# Altium PCB atxmega.PcbDoc
Units mm, origin at the board's own origin, x right, y up, seen from the top; angles counter-clockwise.
Board outline 50.2 x 40.2 mm, 2 copper layers (Top Layer, Bottom Layer); 38 components, 48 nets, 224 pads, 73 vias.
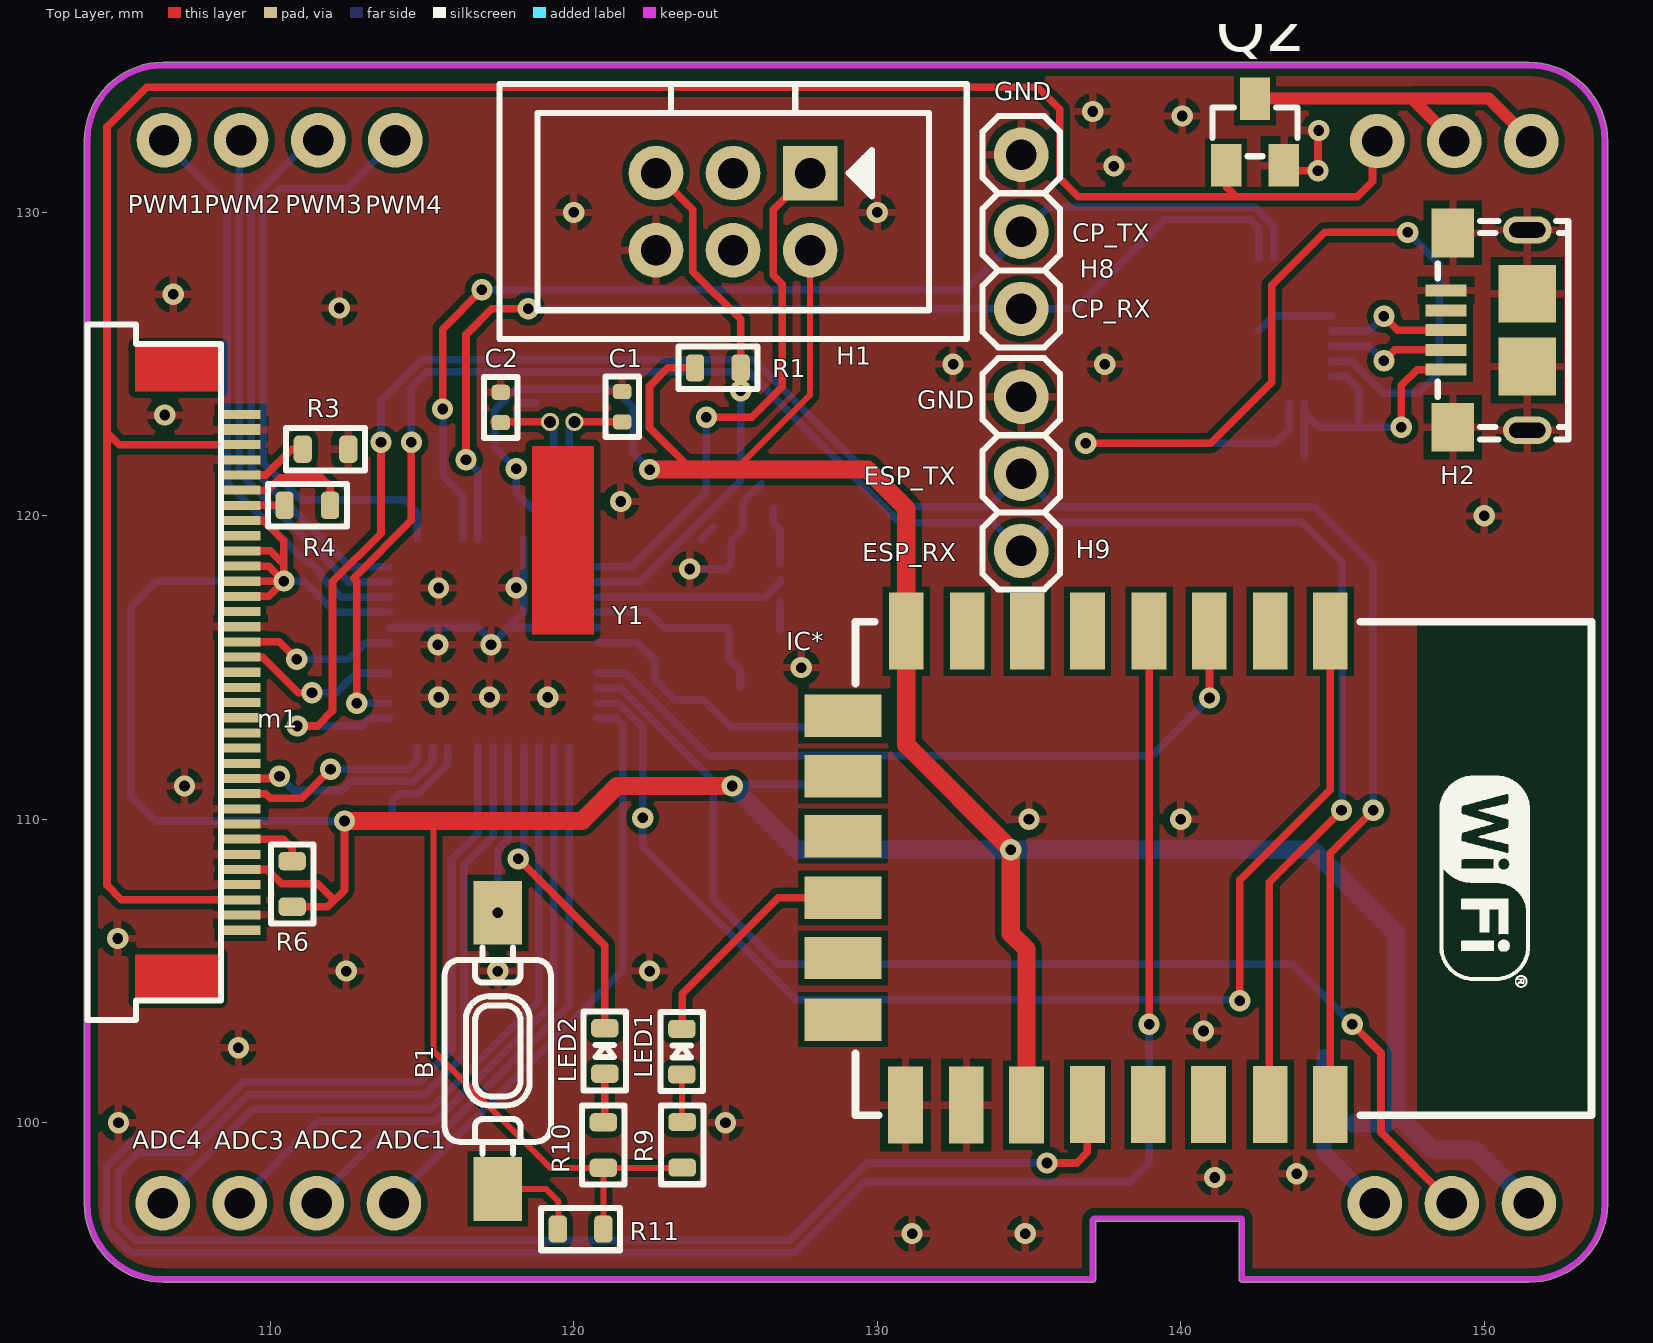
[diagram p0: Top Layer view]
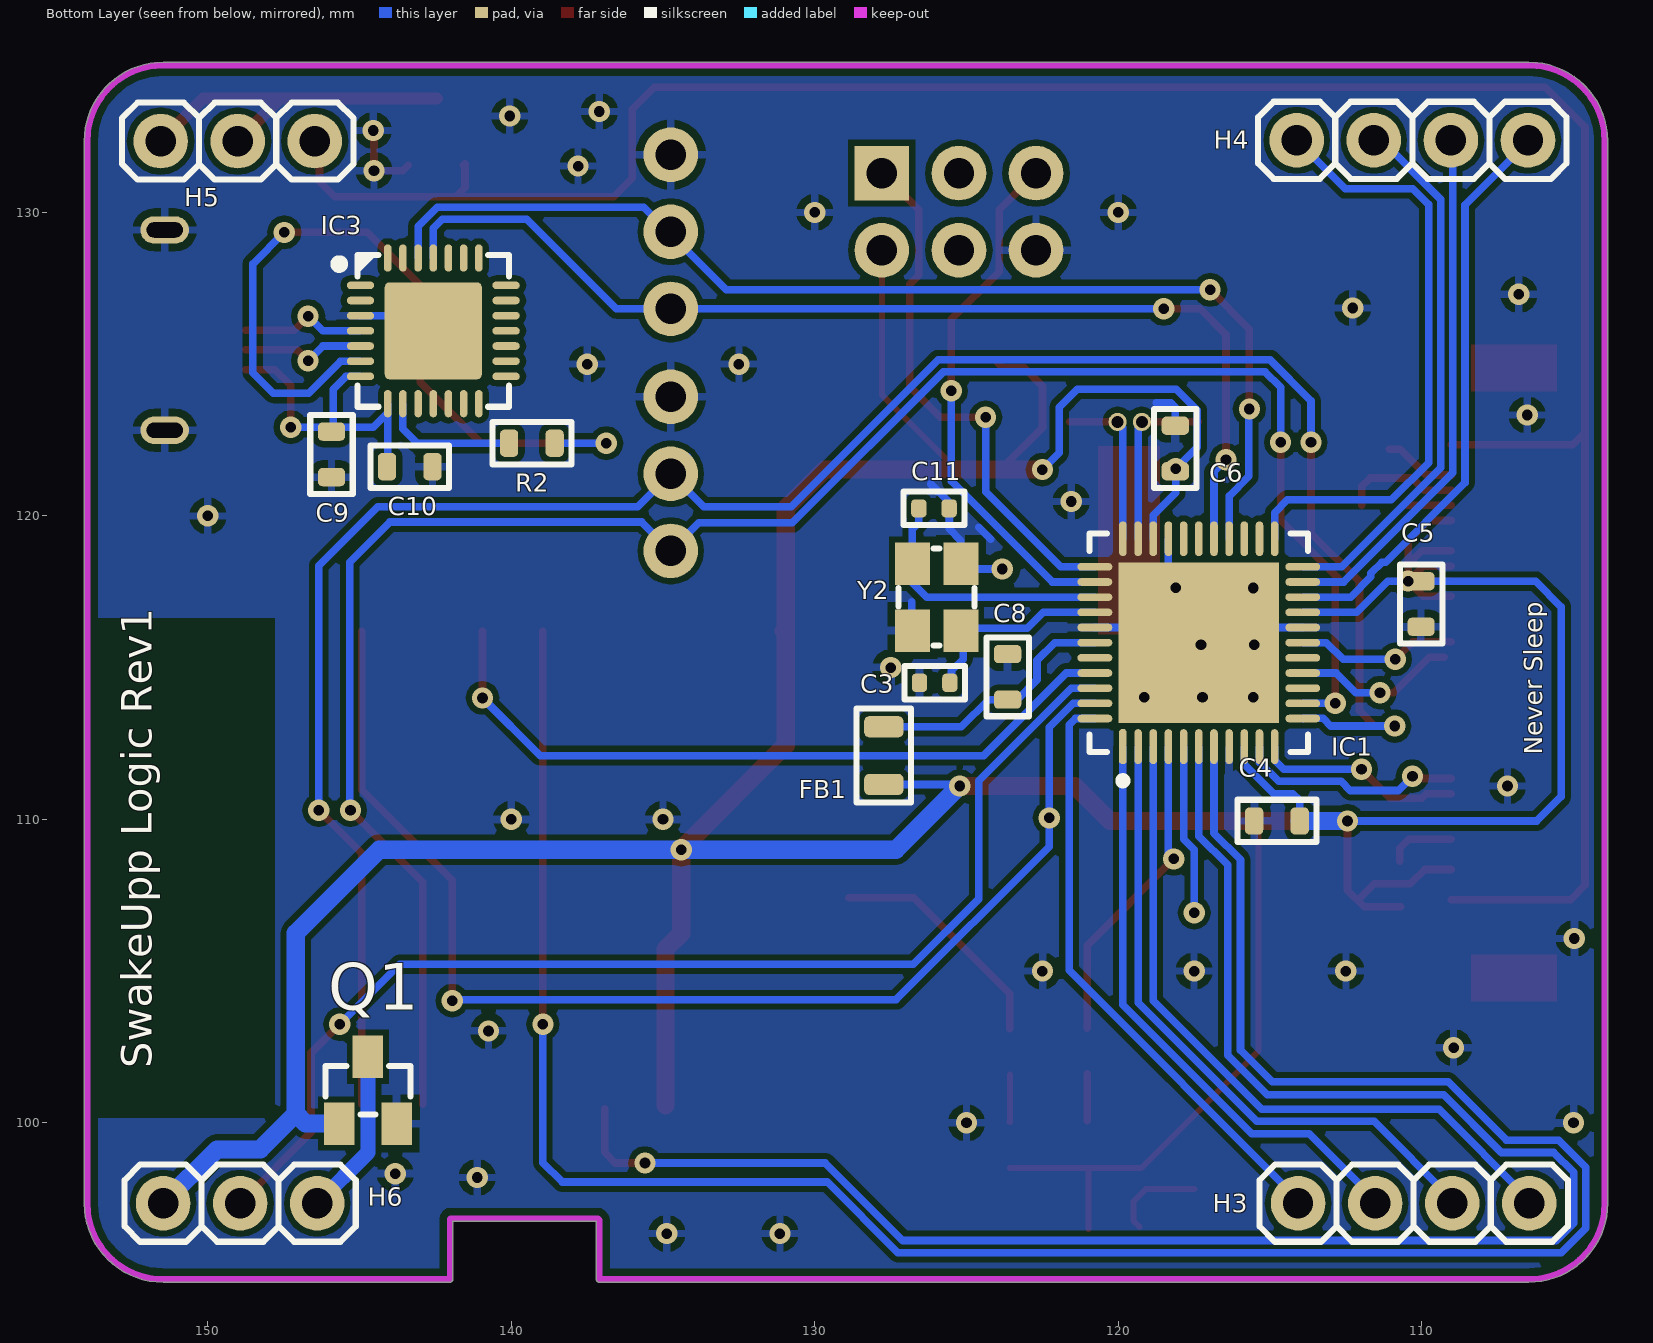
[diagram p1: Bottom Layer view, seen from below]

## Layer stack, top to bottom
Top Solder: solder mask 0.0102, Solder Resist, Dk 3.5
Top Layer: signal copper 0.0356
Dielectric 1: dielectric 0.32, FR-4, Dk 4.8
Bottom Layer: signal copper 0.0356
Bottom Solder: solder mask 0.0102, Solder Resist, Dk 3.5

## Board outline
106.472,94.746 137.1,94.746 ccw(c137.1,94.847) 137.2,94.847 137.2,96.75 141.925,96.75 141.925,94.85 ccw(c142.025,94.85) 141.956,94.777 ccw(c142.028,94.847) 142.028,94.746 151.472,94.746 ccw(c151.472,94.847) 151.476,94.746 ccw(c151.471,97.347) 154.072,97.342 ccw(c153.972,97.347) 154.072,97.347 154.072,132.347 ccw(c151.472,132.347) 151.472,134.947 106.472,134.947 ccw(c106.472,132.347) 103.871,132.353 ccw(c103.972,132.347) 103.871,132.347 103.871,97.347 ccw(c106.472,97.347)

## Design rules (kind name [scope] priority, off if disabled: settings)
Clearance Clearance_1 [OnLayer('Keep-Out Layer') vs InPolygon] p1: gap=0.25
Clearance Clearance_2 [OnLayer('Keep-Out Layer')] p2: gap=0
Clearance Clearance_6 [HasFootprint('FEDUCIAL')] p3: gap=1.1
Clearance [InPolygon] p4: gap=0.2
Clearance Clearance_3 [IsTrack AND AsMM(Width) > 0.2] p5: gap=0.2
Clearance Clearance_4 [All] p6: gap=0.15
ComponentClearance [InComponentClass('Battery_Connection')] p1: gap=0 collisioncheckmode=3 verticalgap=0.1 showdistances=FALSE
ComponentClearance ComponentClearance_1 [All] p2: gap=0.1 collisioncheckmode=3 verticalgap=0.1 showdistances=FALSE
DiffPairsRouting [All] p1: maxlimit=1 minlimit=0.15 mostfreqgap=0.2 toplayer_minwidth=0.15 toplayer_maxwidth=10 toplayer_prefwidth=0.2 bottomlayer_minwidth=0.15 bottomlayer_maxwidth=10 bottomlayer_prefwidth=0.2 maxuncoupledlength=12.7
Height [All] p1: minheight=0 maxheight=1000 prefheight=12.7
HoleSize [All] p1: absolutevalues=TRUE maxlimit=20 minlimit=0.025 maxpercent=80.000 minpercent=20.000
MinimumSolderMaskSliver [All] p1: minsoldermaskwidth=0
PlaneClearance [All] p1: clearance=0.2
PolygonConnect PolygonConnect_3 [All vs IsNamedPolygon('GND_PLANE')] p1: connectstyle=Relief reliefconductorwidth=0.254 reliefentries=4 polygonreliefangle="90 Angle" airgapwidth=0.15
PolygonConnect PolygonConnect_2 [InNamedPolygon('GND_PLANE')] p2: connectstyle=Relief reliefconductorwidth=0.254 reliefentries=4 polygonreliefangle="90 Angle" airgapwidth=0.254
PolygonConnect PolygonConnect_1 [All] p3: connectstyle=Relief reliefconductorwidth=0.254 reliefentries=4 polygonreliefangle="90 Angle" airgapwidth=0.254
RoutingVias [All] p1: holewidth=0.3 width=0.6 viastyle="Through Hole" minholewidth=0.3 minwidth=0.6 maxholewidth=100 maxwidth=100
SilkToSilkClearance [All] p1: silktosilkclearance=0
SilkToSolderMaskClearance [IsPad] p1: minsilkscreentomaskgap=0 clearancetoexposedcopper=TRUE
SolderMaskExpansion [All] p1: expansion=0.102
Width [All] p1: maxlimit=100 minlimit=0.15 preferedwidth=0.2
22 further rules are at their usual default settings.

## Classes and differential pairs
differential pair class USB: D
differential pair D: +D_P -D_N

## Components (designator, comment, footprint, x,y, rotation, side; value= is the part's Value field where it differs from the comment)
B1 "Tactile_Button_2term" TACTILE_MINATUE_SMD_3.5x6mm 117.497,102.372 r270 top
C1 "12pF" C0402 121.597,123.597 r90 top
C2 "12pF" C0402 117.597,123.572 r90 top
C3 "12pF" C0402 126.05,114.5 r0 bottom
C4 "100nF" C0603 114.772,109.947 r0 bottom
C5 "100nF" C0603 110.022,117.097 r270 bottom
C6 "100nF" C0603 118.122,122.222 r90 bottom
C8 "100nF" C0603 123.647,114.697 r90 bottom
C9 "100nF" C0603 145.925,122.025 r90 bottom
C10 "1uF" C0603 143.347,121.622 r0 bottom
C11 "12pF" C0402 126.072,120.247 r180 bottom
FB1 "220R @ 100MHz" L0805 127.725,112.1 r270 bottom
H1 "Header_PDI" 6-HEADER_BOXED 125.25,130.025 r180 top
H2 "USB_5pin" USB_Micro_B_RECEPTABLE_FCI 152.872,126.122 r90 top
H3 "Header_4" Header_MALE_4 114.075,97.35 r180 bottom
H4 "Header_4" Header_MALE_4 106.5,132.375 r0 bottom
H5 "Header_3" Header_MALE_3 146.475,132.35 r0 bottom
H6 "Header_3" Header_MALE_3 151.475,97.35 r180 bottom
H8 "Header_3" Header_MALE_3 134.747,126.822 r90 top
H9 "Header_3" Header_MALE_3 134.747,118.847 r90 top
IC1 "ATXMEGA128A4U-MH" 44-VFQFN-E 117.347,115.822 r90 bottom
IC3 "CP_2102" 28-QFN_Exposed_pad 142.572,126.097 r180 bottom
IC* "ESP12-E" ESP12-E 134.175,107.825 r270 top
LED1 "LED" 0603_LED 123.563,102.345 r90 top
LED2 "LED" 0603_LED 121.025,102.368 r90 top
m1 "OEL Display Module" FFC-35-pin-0.5 107.322,114.847 r0 top
Q1 "N_MOSFET_ENH" SOT-23 144.725,101.075 r180 bottom
Q2 "N_MOSFET_ENH" SOT-23 142.45,132.65 r0 top
R1 "10k" R0603 124.75,124.875 r0 top
R2 "10k" R0603 139.322,122.397 r0 bottom
R3 "70K" R0603 111.822,122.197 r180 top
R4 "10K" R0603 111.222,120.347 r0 top
R6 "10K" R0603 110.722,107.872 r90 top
R9 "1k" R0603 123.575,99.275 r90 top
R10 "1k" R0603 120.975,99.268 r90 top
R11 "10k" R0603 120.225,96.5 r180 top
Y1 "32.768" crystal_6.2x2.1x2.1 120.022,123.097 r90 top
Y2 "Crystal_Ground" Crystal_3.2x2.5 125.985,117.322 r270 bottom

## Footprints (in the part's own frame and the unit in brackets; to place one, negate y for a bottom-side part, rotate by r counter-clockwise, add the part's x,y. Pads: shape width x height; smd on the part's side, far side on the other; paste and mask are expansions set on the pad)
6-HEADER_BOXED [mm]
  rect 1.8x1.8 hole 1: 1(-2.54,-1.27)
  round 1.8 hole 1: 2(-2.54,1.27) 3(0,-1.27) 4(0,1.27) 5(2.54,-1.27) 6(2.54,1.27)
  silkscreen extent -7.7,-4.2 7.7,4.2, body extent -7.7,-4.2 7.7,4.2, height 9.3
28-QFN_Exposed_pad [mm] "QFN, 28-Leads, Body 5,00x5,00mm, Pitch 0,50mm"
  oval 0.9x0.25 smd: 1(-2.4,1.5) 2(-2.4,1) 3(-2.4,0.5) 4(-2.4,0) 5(-2.4,-0.5) 6(-2.4,-1) 7(-2.4,-1.5) 15(2.4,-1.5) 16(2.4,-1) 17(2.4,-0.5) 18(2.4,0) 19(2.4,0.5) 20(2.4,1) 21(2.4,1.5)
  oval 0.25x0.9 smd: 8(-1.5,-2.4) 9(-1,-2.4) 10(-0.5,-2.4) 11(0,-2.4) 12(0.5,-2.4) 13(1,-2.4) 14(1.5,-2.4) 22(1.5,2.4) 23(1,2.4) 24(0.5,2.4) 25(0,2.4) 26(-0.5,2.4) 27(-1,2.4) 28(-1.5,2.4)
  rrect10% 3.2x3.2 smd paste-20: PAD(0,0)
  silkscreen extent -3.24,-2.5 2.5,2.5, body extent -2.52,-2.52 2.52,2.52, height 0.91
44-VFQFN-E [mm] "44-VFQFN Exposed Pad  7x7"
  oct 1.15x0.25 smd: 1(-3.425,2.5)
  oval 1.15x0.25 smd: 2(-3.425,2) 3(-3.425,1.5) 4(-3.425,1) 5(-3.425,0.5) 6(-3.425,0) 7(-3.425,-0.5) 8(-3.425,-1) 9(-3.425,-1.5) 10(-3.425,-2) 11(-3.425,-2.5) 23(3.425,-2.5) 24(3.425,-2) 25(3.425,-1.5) 26(3.425,-1) 27(3.425,-0.5) 28(3.425,0) 29(3.425,0.5) 30(3.425,1) 31(3.425,1.5) 32(3.425,2) 33(3.425,2.5)
  oval 0.25x1.15 smd: 12(-2.5,-3.425) 13(-2,-3.425) 14(-1.5,-3.425) 15(-1,-3.425) 16(-0.5,-3.425) 17(0,-3.425) 18(0.5,-3.425) 19(1,-3.425) 20(1.5,-3.425) 21(2,-3.425) 22(2.5,-3.425) 34(2.5,3.425) 35(2,3.425) 36(1.5,3.425) 37(1,3.425) 38(0.5,3.425) 39(0,3.425) 40(-0.5,3.425) 41(-1,3.425) 42(-1.5,3.425) 43(-2,3.425) 44(-2.5,3.425)
  rect 5.3x5.3 smd: 45(0,0)
  silkscreen extent -4.67,-3.6 3.6,3.6, body extent -3.57,-3.57 3.57,3.57, height 1
0603_LED [mm]
  rrect50% 0.6x0.9 smd: A(-0.75,0) C(0.75,0)
  silkscreen extent -1.3,-0.7 1.3,0.7, body extent -0.81,-0.4 0.81,0.4, height 0.6
C0402 [mm]
  rrect50% 0.5x0.6 smd: 1(-0.5,0) 2(0.5,0)
  silkscreen extent -1,-0.55 1,0.55, body extent -0.51,-0.26 0.51,0.26, height 0.51
C0603 [mm]
  rrect50% 0.6x0.9 smd: 1(-0.75,0) 2(0.75,0)
  silkscreen extent -1.3,-0.7 1.3,0.7, body extent -0.86,-0.41 0.86,0.41, height 0.81
Crystal_3.2x2.5 [mm]
  rect 1.4x1.15 smd: 1(-1.1,-0.8) 2(-1.1,0.8) 2(1.1,-0.8) 3(1.1,0.8)
  silkscreen extent -1.6,-1.25 1.6,1.25, body extent -1.6,-1.25 1.6,1.25, height 0.6
crystal_6.2x2.1x2.1 [mm] "lying cylinder"
  round 0.6 hole 0.4: 0(0,0) 1(0,0.8)
  Top Layer region: -7,-0.65 -0.8,-0.65 -0.8,1.4 -7,1.4
  body extent -7.03,-0.7 -0.83,1.4, height 2.09
ESP12-E [mil] "WIFI module"
  rect 100x45 smd: 1(-329.79,423.34) 2(-329.79,345.34) 3(-329.79,266.34) 4(-329.79,188.34) 5(-329.79,108.34) 6(-329.79,30.34) 7(-329.79,-47.66) 8(-329.79,-126.66) 15(285.21,-127.66) 16(285.21,-48.66) 17(285.21,29.34) 18(284.21,108.34) 19(284.21,187.34) 20(284.21,265.34) 21(284.21,345.34) 22(284.21,423.34)
  rect 55x100 smd: 9(-219.79,-208.66) 10(-141.79,-208.66) 11(-63.79,-208.66) 12(16.21,-208.66) 13(94.21,-208.66) 14(174.21,-208.66)
  silkscreen extent -342,-193 298,762, body extent -339,-185 291,760
FFC-35-pin-0.5 [mm] "Flat Flexible Connector 35 positions pitch 0.5mm"
  rect 1.3x0.3 smd: 1(1.7,8.5) 3(1.7,7.5) 4(1.7,7) 5(1.7,6.5) 6(1.7,6) 7(1.7,5.5) 8(1.7,5) 9(1.7,4.5) 10(1.7,4) 11(1.7,3.5) 12(1.7,3) 13(1.7,2.5) 14(1.7,2) 15(1.7,1.5) 16(1.7,1) 17(1.7,0.5) 18(1.7,0) 19(1.7,-0.5) 20(1.7,-1) 21(1.7,-1.5) 22(1.7,-2) 23(1.7,-2.5) 24(1.7,-3) 25(1.7,-3.5) 26(1.7,-4) 27(1.7,-4.5) 28(1.7,-5) 29(1.7,-5.5) 30(1.7,-6) 31(1.7,-6.5) 32(1.7,-7) 33(1.7,-7.5) 34(1.7,-8) 35(1.7,-8.5)
  rect 1.3x0.35 smd: 2(1.7,8)
  Top Layer region: -1.775,9.25 1.05,9.25 1.05,10.8 -1.775,10.8
  Top Layer region: -1.775,-10.85 1.05,-10.85 1.05,-9.3 -1.775,-9.3
  silkscreen extent -3.35,-11.47 1.05,11.47, body extent -3.35,-11.48 1.05,11.42, height 2
Header_MALE_3 [mm]
  round 1.8 hole 1: 1(0,0) 2(2.54,0) 3(5.08,0)
  silkscreen extent -1.27,-1.27 6.35,1.27, body extent -1.27,-1.27 6.35,1.27, height 8.34
Header_MALE_4 [mm]
  round 1.8 hole 1: 1(0,0) 2(2.54,0) 3(5.08,0) 4(7.62,0)
  silkscreen extent -1.27,-1.27 8.89,1.27, body extent -1.27,-1.27 8.89,1.27, height 8.34
L0805 [mm]
  rrect50% 0.7x1.3 smd: 1(-0.95,0) 2(0.95,0)
  silkscreen extent -1.55,-0.9 1.55,0.9, body extent -1.01,-0.61 1.01,0.61, height 0.81
R0603 [mm]
  rrect50% 0.6x0.9 smd: 1(-0.75,0) 2(0.75,0)
  silkscreen extent -1.3,-0.7 1.3,0.7, body extent -0.86,-0.41 0.86,0.41, height 0.51
SOT-23 [mm]
  rect 1x1.4 smd: 1(-0.95,-1.1) 2(0.95,-1.1) 3(0,1.1)
  silkscreen extent -1.4,-0.8 1.4,0.8, body extent -1.4,-1.5 1.4,1.5, height 1
TACTILE_MINATUE_SMD_3.5x6mm [mm] "TE CONNECTIVITY FSM"
  rect 2.1x1.6 smd: 1(-4.55,0) 2(4.55,0)
  silkscreen extent -3.4,-1.75 3.4,1.75, body extent -5,-1.75 5,1.75, height 4.3
USB_Micro_B_RECEPTABLE_FCI [mm] "Micro USB header, surface mount with slots right angle"
  rect 0.4x1.35 smd: 1(-1.3,4.125) 2(-0.65,4.125) 3(0,4.125) 4(0.65,4.125) 5(1.3,4.125)
  oval 0.9x1.6 hole 0.5 slot 1.2 at 90 deg paste+0: SHIELD(-3.3,1.45)
  rect 1.6x1.4 smd: SHIELD(-3.2,3.9) SHIELD(3.2,3.9)
  rect 1.9x1.9 smd: SHIELD(-1.2,1.45) SHIELD(1.2,1.45)
  oval 0.9x1.6 hole 0.5 slot 1.2 at 90 deg paste+1: SHIELD(3.3,1.45)
  silkscreen extent -3.6,0.1 3.6,4.4, body extent -3.99,-0.8 3.99,4.63, height 2.71

## Part data
C1 C2 C3 C4 C5 C6 C8 C9 C10 C11: library part Capacitor, "Schematic symbol of a capacitor"
FB1: library part Ferrite
H1: "6-pin Boxed header with pinout used for PDI programming by Atmel programmers"
H2: "5 Pins USB Connector"
H3 H4: "Generic 4pin header symbol"
H5 H6 H8 H9: "Generic 3pin header symbol"
IC1: "AVR AVR® XMEGA® A4U Microcontroller IC 8/16-Bit 32MHz 128KB (64K x 16) FLASH 44-VQFN (7x7)"
IC3: "Single chip USB to UART Bridge"
LED1 LED2: "Schematic symbol of a LED"
m1: "Part ID: UG-6028GDEAF01"
Q1 Q2: "N Channel Enhancement type MOSFET schematic symbol"
R1 R2 R3 R4 R6 R9 R10 R11: library part Resistor, "Schematic symbol of a resistor"
Y1: library part "Abracon LLC AB26T-32.768KHZ", "32.768kHz ±20ppm Crystal 12.5pF 35 kOhm -10°C ~ 60°C Through Hole Cylindrical Can, Radial"
Y2: "Schematic symbol of a 2pin crystal with case connection"

## Via types
v1: diameter 0.7, hole 0.35, Top Layer to Bottom Layer, tented top, 72 vias
v2: diameter 0.7, hole 0.35, Top Layer to Bottom Layer, 1 vias

## Nets (pads, with @x,y where several pads share a name; then routed paths per layer and width w, separated by ;. In a path a pad name is that pad's centre, name@x,y a point inside that pad or via, vN(x,y) a via of type N, cw(c..) or ccw(c..) an arc to the next point about the centre after c; other vN are vias at no path point)
3V3: C4.1 C5.1 C6.1 FB1.2 H1.2 H6.1 IC1.9 IC1.19 IC1.31 IC*.8 IC*.17 m1.8 m1.10 m1.11 m1.12 m1.13 m1.31 Q1.1 R1.1 R6.1 R9.1 R10.1 R11.1 | length 173.2
  Top Layer w0.2: 115.35,109.947 115.375,109.922 115.375,102.375 119.232,98.518 R10.1 ; R11.1 R10.1 ; R9.1@123.568,98.518 R10.1 ; 125.325,121.525 127.79,123.99 H1.2 ; 130.958,120.242 131.075,120.125
  Top Layer w0.25: m1.31 109.903,108.347 110.378,107.872 111.572,107.872 112.097,107.347 ; m1.13 109.947,117.347 v1@110.447,117.847 ; m1.12 v1@110.447,117.847 ; m1.11 109.953,118.347 v1(110.45,117.85) ; m1.10 110.003,118.847 110.45,118.4 ; m1.8 109.79,119.847 110.45,119.187 110.45,118.4 ; R6.1@110.697,107.122 R6.1 111.897,107.122 112.447,107.672 v1(112.447,109.947) ; 123.9,121.5 122.497,122.903 122.497,124.272 123.1,124.875 123.8,124.875 R1.1@123.972,125.047 ; v1@110.447,117.847 v1(110.45,117.85) ; v1(110.45,117.85) 110.45,118.4
  Top Layer w0.6: v1(112.447,109.947) 113.322,109.947 ; 113.447,109.947 115.35,109.947 120.272,109.947 121.425,111.1 v1(125.225,111.1) ; v1(122.5,121.525) 129.675,121.525 130.958,120.242 IC*.8@130.958,116.269 ; IC*.8@131.025,116.202 IC*.8@130.958,116.269 ; IC*.17 134.92,105.72 134.4,106.24 v1(134.4,109) 130.958,112.442 IC*.8 IC*.8@130.958,116.269
  Bottom Layer w0.25: C5.1 106.247,117.847 105.397,116.997 105.397,110.753 106.203,109.947 v1(112.447,109.947) ; C5.1@110.272,118.022 110.443,117.85 v1(110.45,117.85) 111.118,117.85 112.147,116.822 IC1.19 ; C4.1 114.022,110.622 114.25,110.85 114.881,110.85 115.847,111.815 IC1.9 ; IC1.31 118.847,120.022 118.106,120.762 v1(118.106,121.556) 117.397,122.265 117.397,123.481 118.087,124.172 121.353,124.172 121.95,123.575 121.95,122.075 v1(122.5,121.525)
  Bottom Layer w0.254: v1@125.275,111.15 127.568,111.15 FB1.2@127.722,110.997
  Bottom Layer w0.6: v1(112.447,109.947) 112.472,109.947 C4.1 ; v1(125.225,111.1) 127.325,109 v1(134.4,109) 144.35,109 147.1,106.25 147.1,100.3 ; Q1.1 146.775,99.975 147.1,100.3 ; H6.1 149.7,99.125 148.275,99.125 147.1,100.3
13V: H5.1 m1.3 m1.33 Q2.1 | length 82
  Top Layer w0.25: m1.33 105.097,107.347 104.622,107.822 104.622,122.747 ; m1.3 105.022,122.347 104.622,122.747 ; Q2.1@141.575,131.55 141.525,131.6 141.525,130.822 141.825,130.522 ; H5.1@146.322,132.322 146.322,131.028 145.815,130.522 136.622,130.522 136.022,131.122 136.022,133.397 135.293,134.125 105.925,134.125 104.622,132.822 104.622,122.747
!PWR_SAVE: H6.2 IC1.42 | length 39.4
  Top Layer w0.254: v1(145.65,103.25) 146.6,102.3 146.6,99.685 H6.2
  Bottom Layer w0.25: IC1.42 121.553,114.322 124.6,111.274 124.6,107.375 126.753,105.222 142.753,105.222
  Bottom Layer w0.254: 142.753,105.222 143.678,105.222 v1(145.65,103.25) ; H6.2@148.503,97.297 H6.2@148.932,97.297
AVCC: C8.1 FB1.1 IC1.39 | length 8.5
  Bottom Layer w0.25: IC1.39 122.097,115.822 122.678,115.24 122.678,114.597 123.328,113.947 C8.1 124.272,113.947 125.168,113.05 127.568,113.05 FB1.1@127.722,112.897
BUT_1: B1.1 IC1.5 | length 5.6
  Bottom Layer w0.25: v2(117.497,106.922) 117.497,108.997 117.847,109.347 IC1.5
CP_RX: H8.1 IC1.27 IC3.25 | length 35.7
  Top Layer w0.25: v1(116.45,121.85) 116.45,125.975 117.297,126.822 v1(118.5,126.822)
  Bottom Layer w0.25: v1(116.45,121.85) 116.847,121.453 IC1.27 ; v1(118.5,126.822) H8.1 136.537,126.822 139.487,129.772 142.281,129.772 142.572,129.481 IC3.25
CP_TX: H8.2 IC1.26 IC3.26 | length 37.5
  Top Layer w0.25: v1(115.678,123.522) 115.678,126.153 v1(116.975,127.45)
  Bottom Layer w0.25: v1(115.678,123.522) 115.7,123.5 115.7,121.3 116.347,120.653 IC1.26 ; v1(116.975,127.45) 132.91,127.45 135.632,130.172 142.447,130.172 143.072,129.547 IC3.26
D_N: H2.2 IC3.5 | length 4.1
  Top Layer w0.25: v1(146.697,125.112) 147.057,125.472 H2.2
  Bottom Layer w0.25: IC3.5 146.212,125.597 v1(146.697,125.112)
D_P: H2.3 IC3.4 | length 4.2
  Top Layer w0.25: v1(146.697,126.582) 147.157,126.122 H2.3
  Bottom Layer w0.25: IC3.4 146.212,126.097 v1(146.697,126.582)
ESP_EN: IC1.41 IC*.3 | length 24.3
  Top Layer w0.254: v1(140.95,114) IC*.3@140.95,116.202
  Bottom Layer w0.254: IC1.41 121.718,114.822 124.439,112.1 139.05,112.1 v1(140.95,114)
ESP_FP: IC1.6 IC*.18 | length 60
  Top Layer w0.25: v1(135.597,98.675) 136.575,98.675 136.925,99.025 IC*.18@136.925,100.454
  Bottom Layer w0.25: IC1.6 117.347,109.448 116.397,108.498 116.397,102.222 115.097,100.922 109.272,100.922 107.372,99.022 105.647,99.022 104.997,98.372 104.997,96.697 105.572,96.122 127.097,96.122 129.65,98.675 v1(135.597,98.675)
ESP_RST: IC1.43 IC*.1 | length 40.9
  Top Layer w0.25: v1(141.95,104.025) 141.95,108 144.928,110.978 IC*.1
  Bottom Layer w0.25: IC1.43 121.487,113.822 122.272,113.037 v1(122.272,110.047) 122.272,109.103 127.325,104.05 v1@141.95,104.05
ESP_RX: H9.1 IC1.13 IC*.21 | length 65.5
  Top Layer w0.25: v1(112.85,113.825) 112.85,117.85 112.75,117.95 114.65,119.85 v1(114.65,122.425) ; IC*.21@142.925,100.606 142.925,107.925 v1(145.3,110.3)
  Bottom Layer w0.25: v1(112.85,113.825) 113.918,113.825 IC1.13 ; v1(114.65,122.425) 114.65,124.234 115.166,124.75 125.759,124.75 130.737,119.772 133.822,119.772 H9.1 135.697,119.797 144.003,119.797 145.325,118.475 v1@145.325,110.275
ESP_SLP: IC1.7 IC*.4 | length 78.8
  Top Layer w0.25: v1(138.959,103.25) IC*.4
  Bottom Layer w0.25: IC1.7 116.847,109.549 115.972,108.674 115.972,102.398 114.92,101.347 109.131,101.347 107.206,99.422 105.481,99.422 104.597,98.537 104.597,96.531 105.406,95.722 127.262,95.722 129.591,98.05 138.325,98.05 138.959,98.684 v1(138.959,103.25)
ESP_TX: H9.2 IC1.12 IC*.22 | length 71.5
  Top Layer w0.25: v1(110.889,113.075) 111.55,113.075 112.05,113.575 112.05,117.825 113.65,119.425 v1(113.65,122.425) ; IC*.22 144.928,108.884 v1(146.344,110.3)
  Bottom Layer w0.25: v1(110.889,113.075) 113,113.075 113.25,113.325 113.918,113.325 IC1.12 ; v1(113.65,122.425) 113.65,123.8 115,125.15 125.925,125.15 130.778,120.297 133.657,120.297 H9.2 ; H9.2@134.192,121.941 135.172,120.961 135.837,120.297 144.403,120.297 146.344,118.356 v1(146.344,110.3)
GND: C1.2 C2.2 C3.2 C4.2 C5.2 C6.2 C8.2 C9.1 C10.1 C11.2 H1.6 H2.5 H2.SHIELD H8.3 H9.3 IC1.8 IC1.18 IC1.30 IC1.38 IC1.45 IC3.3 IC3.PAD IC*.15 IC*.16 m1.2 m1.4 m1.15 m1.27 m1.28 m1.30 m1.32 m1.34 Q1.2 Q2.2 R3.1 Y2.2 | length 22.8
  Top Layer w0.25: Q2.2 143.575,131.375 v1(144.525,131.375) 144.525,132.675 v1(144.55,132.7)
  Bottom Layer w0.25: IC1.18 116.847,116.322 IC1.45 IC1.45@117.847,116.322 ; C6.2 118.122,123.571 118.275,123.725 118.75,123.725 ; IC1.30 118.347,116.822 IC1.45@117.847,116.322 ; IC1.38 IC1.45@117.847,116.322 ; v1(123.825,118.25) 125.014,118.25 125.185,118.422 125.185,119.185 125.575,119.575 125.575,120.243 C11.2 125.572,120.447 126.175,121.05 ; 124.2,119.225 124.6,119.625 ; Y2.2@126.785,116.222 126.799,116.235 126.799,117.176 ; IC3.PAD 143.072,126.597 IC3.3
  other v1: 131.15,96.35 134.875,96.35 141.125,98.2 143.825,98.325 105,100 125,100 108.95,102.475 140.75,103.025 112.5,105 117.5,105 122.5,105 104.975,106.075 135,110 140,110 107.175,111.1 115.547,114.022 117.225,114.025 119.147,114.022 127.5,115 115.525,115.75 117.275,115.75 115.547,117.622 118.106,117.631 150,120 121.55,120.475 106.525,123.325 132.5,125 137.5,125 112.275,126.85 106.8,127.3 120,130 130,130 137.8,131.525 140.05,133.175 137.1,133.325
LED_1: IC*.12 LED1.C | length 7.8
  Top Layer w0.254: LED1.C@123.575,103.107 123.575,104.25 126.738,107.413 IC*.12
LED_2: IC1.4 LED2.C | length 10.5
  Top Layer w0.25: v1(118.172,108.697) 121.025,105.843 LED2.C
  Bottom Layer w0.25: v1(118.172,108.697) 118.347,108.872 IC1.4
NetB1_2: B1.2 R11.2 | length 3.1
  Top Layer w0.2: B1.2 119.078,97.822 119.5,97.4 119.5,96.775 R11.2@119.3,96.575
NetH1_1: H1.1 IC1.34 | length 17.7
  Top Layer w0.25: v1(124.372,123.247) 125.872,123.247 126.875,124.25 126.875,127.625 126.575,127.925 126.575,130.08 H1.1
  Bottom Layer w0.25: IC1.34 121.897,118.322 124.372,120.797 v1(124.372,123.247)
NetH1_5: H1.5 IC1.35 R1.2 | length 17.4
  Top Layer w0.25: H1.5 123.925,130.08 123.925,128.05 125.5,126.475 v1(125.5,124.125)
  Bottom Layer w0.25: IC1.35 122.172,117.822 125.5,121.15 v1(125.5,124.125)
NetH3_1: H3.1 IC1.44 | length 19.6
  Bottom Layer w0.25: H3.1@114.122,97.522 121.622,105.022 121.622,113.122 121.422,113.322 IC1.44
NetH3_2: H3.2 IC1.1 | length 19.4
  Bottom Layer w0.25: H3.2@111.582,97.522 113.707,99.647 115.603,99.647 119.847,103.89 IC1.1
NetH3_3: H3.3 IC1.2 | length 21.4
  Bottom Layer w0.25: H3.3@109.042,97.522 111.567,100.047 115.437,100.047 119.347,103.956 IC1.2
NetH3_4: H3.4 IC1.3 | length 23.4
  Bottom Layer w0.25: H3.4@106.502,97.522 109.427,100.447 115.272,100.447 118.847,104.022 IC1.3
NetH4_1: H4.1 IC1.20 | length 19.1
  Bottom Layer w0.25: H4.1@106.472,132.347 108.575,130.243 108.575,121.093 111.193,118.475 111.309,118.475 111.675,118.109 111.675,117.993 112.347,117.322 IC1.20
NetH4_2: H4.2 IC1.21 | length 17.4
  Bottom Layer w0.25: H4.2@109.012,132.347 108.975,132.31 108.975,121.418 112.572,117.822 IC1.21
NetH4_3: H4.3 IC1.22 | length 17.8
  Bottom Layer w0.25: H4.3 111.325,132.375 109.375,130.425 109.375,121.584 112.637,118.322 IC1.22
NetH4_4: H4.4 IC1.23 | length 20.3
  Bottom Layer w0.25: H4.4 112.52,130.775 110.291,130.775 109.775,130.259 109.775,121.749 110.999,120.525 114.425,120.525 114.847,120.103 IC1.23
NetH5_2: H5.2 H5.3 Q2.3 | length 11.7
  Top Layer w0.4: Q2.3 147.615,133.75 ; H5.2 147.615,133.75 ; H5.3 150.155,133.75 147.615,133.75
NetH6_3: H6.3 Q1.3 | length 5.5
  Bottom Layer w0.5: Q1.3 144.725,99.02 H6.3
NetIC3_6: IC3.6 R2.1 | length 26.4
  Top Layer w0.25: v1(136.872,122.397) 140.997,122.397 142.997,124.397 142.997,127.597 144.747,129.347 147.474,129.347 v1(147.479,129.341)
  Bottom Layer w0.25: v1(136.872,122.397) R2.1 ; IC3.6 145.628,125.097 146.678,124.047 147.847,124.047 148.522,124.722 148.522,128.299 v1(147.479,129.341)
NetIC3_9: IC3.9 R2.2 | length 4.5
  Bottom Layer w0.25: R2.2 143.097,122.397 143.572,122.872 IC3.9
NetLED1_A: LED1.A R9.2 | length 1.6
  Top Layer w0.2: LED1.A 123.563,100.037 R9.2
NetLED2_A: LED2.A R10.2 | length 1.5
  Top Layer w0.254: R10.2@121.025,100.068 LED2.A
Netm1_5: m1.5 R3.2 | length 2.4
  Top Layer w0.25: m1.5 109.855,121.347 110.705,122.197 R3.2
Netm1_6: m1.6 R4.2 | length 3.9
  Top Layer w0.25: m1.6 109.92,120.847 110.32,121.247 111.697,121.247 111.972,120.972 R4.2
Netm1_7: m1.7 R4.1 | length 1.5
  Top Layer w0.25: m1.7 R4.1
Netm1_29: m1.29 R6.2 | length 2.3
  Top Layer w0.25: m1.29 110.428,109.347 110.722,109.053 R6.2
OSC1: C1.1 IC1.33 Y1.0 | length 5.5
  Top Layer w0.25: Y1.0 C1.1
  Bottom Layer w0.25: IC1.33 119.847,122.922 Y1.0
OSC2: C2.1 IC1.32 Y1.1 | length 5.8
  Top Layer w0.25: C2.1@117.372,123.097 Y1.1
  Bottom Layer w0.25: Y1.1 119.347,122.972 IC1.32
SCRN_CSB: IC1.11 m1.26 | length 6.9
  Top Layer w0.25: m1.26 109.847,110.847 109.997,110.697 111.033,110.697 v1(111.987,111.65)
  Bottom Layer w0.25: v1(111.987,111.65) 114.55,111.65 114.847,111.947 IC1.11
SCRN_RS: IC1.10 m1.25 | length 7.5
  Top Layer w0.25: m1.25 109.972,111.347 110.147,111.522 110.247,111.422 v1(110.306,111.422)
  Bottom Layer w0.25: v1(110.306,111.422) 110.777,110.95 112.35,110.95 112.65,111.25 114.716,111.25 115.347,111.881 IC1.10
SCRN_SCL: IC1.17 m1.16 | length 5.4
  Top Layer w0.25: m1.16 110.297,115.847 v1(110.872,115.272)
  Bottom Layer w0.25: v1(110.872,115.272) 112.59,115.272 113.14,115.822 IC1.17
SCRN_SDI: IC1.15 m1.17 | length 5.4
  Top Layer w0.25: m1.17@109.253,115.347 109.753,115.347 110.675,114.425 110.925,114.175 v1(111.375,114.175)
  Bottom Layer w0.25: v1(111.375,114.175) 112.175,114.175 112.822,114.822 IC1.15
VBUS: C9.2 C10.2 H2.1 IC3.7 IC3.8 | length 10.6
  Top Layer w0.25: v1(147.272,122.922) 147.272,124.297 147.797,124.822 H2.1
  Bottom Layer w0.25: C10.2@144.072,121.947 IC3.8@144.072,123.397 ; IC3.8 IC3.8@144.072,123.397 ; IC3.7 145.447,124.597 145.872,124.172 C9.2@145.872,122.922 ; v1@147.322,122.872 v1(147.272,122.922) C9.2@145.872,122.922 ; IC3.8@144.072,123.397 144.547,122.922 C9.2@145.872,122.922
XTAL1: C11.1 IC1.36 Y2.1 | length 8.2
  Bottom Layer w0.25: IC1.36 126.31,117.322 126.822,117.833 Y2.1@126.822,117.897 ; C11.1 126.572,119.772 126.785,119.558 Y2.1
XTAL2: C3.1 IC1.37 Y2.3 | length 6.6
  Bottom Layer w0.25: IC1.37 122.472,116.822 122.997,116.297 125.11,116.297 125.11,115.283 125.497,114.897 C3.1@125.497,114.372
pads on no net: H1.3 H1.4 H2.4 IC1.14 IC1.16 IC1.24 IC1.25 IC1.28 IC1.29 IC1.40 IC3.1 IC3.2 IC3.10 IC3.11 IC3.12 IC3.13 IC3.14 IC3.15 IC3.16 IC3.17 IC3.18 IC3.19 IC3.20 IC3.21 IC3.22 IC3.23 IC3.24 IC3.27 IC3.28 IC*.2 IC*.5 IC*.6 IC*.7 IC*.9 IC*.10 IC*.11 IC*.13 IC*.14 IC*.19 IC*.20 m1.1 m1.9 m1.14 m1.18 m1.19 m1.20 m1.21 m1.22 m1.23 m1.24 m1.35

## Polygon pours and split planes (outlines as drawn)
GND on Top Layer "TOPGND" (solid, pour order 14): 106.472,94.746 137.1,94.746 ccw(c137.1,94.847) 137.2,94.847 137.2,96.75 141.925,96.75 141.925,94.85 ccw(c142.025,94.85) 141.956,94.777 ccw(c142.028,94.847) 142.028,94.746 151.472,94.746 ccw(c151.472,94.847) 151.476,94.746 ccw(c151.471,97.347) 154.072,97.342 ccw(c153.972,97.347) 154.072,97.347 154.072,132.347 ccw(c151.472,132.347) 151.472,134.947 106.472,134.947 ccw(c106.472,132.347) 103.871,132.353 ccw(c103.972,132.347) 103.871,132.347 103.871,97.347 ccw(c106.472,97.347)
GND on Bottom Layer "BOTGND" (solid, pour order 15): 106.472,94.746 137.1,94.746 ccw(c137.1,94.847) 137.2,94.847 137.2,96.75 141.925,96.75 141.925,94.85 ccw(c142.025,94.85) 141.956,94.777 ccw(c142.028,94.847) 142.028,94.746 151.472,94.746 ccw(c151.472,94.847) 151.476,94.746 ccw(c151.471,97.347) 154.072,97.342 ccw(c153.972,97.347) 154.072,97.347 154.072,132.347 ccw(c151.472,132.347) 151.472,134.947 106.472,134.947 ccw(c106.472,132.347) 103.871,132.353 ccw(c103.972,132.347) 103.871,132.347 103.871,97.347 ccw(c106.472,97.347)

## Keep-outs
Keep-Out Layer:
  lines w0.2: 103.972,97.347 ccw(c106.472,97.347) 106.472,94.847 137.1,94.847 137.1,96.8 137.15,96.85 142,96.85 142.025,96.825 142.025,94.85 142.028,94.847 151.472,94.847 ccw(c151.472,97.347) 153.972,97.347 153.972,132.347 ccw(c151.472,132.347) 151.472,134.847 144.897,134.847 106.472,134.847 ccw(c106.472,132.347) 103.972,132.347 103.972,97.347

## Other copper
Multi-Layer:
  pour cut-out: 153.972,116.647 147.775,116.647 147.775,100.147 153.972,100.147

## Silkscreen, mask and mechanical layers (free items; w line width, h text height)
Top Overlay:
  text "GND" at 133.85,133.7 h0.6
  text "PWM1" at 105.297,129.978 h0.6
  text "PWM2" at 107.822,129.978 h0.6
  text "PWM3" at 110.497,129.978 h0.6
  text "PWM4" at 113.125,129.95 h0.6
  text "CP_TX" at 136.425,129.025 h0.6
  text "CP_RX" at 136.4,126.525 h0.6
  text "GND" at 131.325,123.525 h0.6
  text "ESP_TX" at 129.55,121.025 h0.6
  text "ESP_RX" at 129.5,118.5 h0.6
  text "ADC4" at 105.447,99.153 h0.6
  text "ADC2" at 110.797,99.153 h0.6
  text "ADC1" at 113.497,99.153 h0.6
  text "ADC3" at 108.147,99.128 h0.6
Bottom Overlay:
  text "Never Sleep" at 106.022,112.122 h0.6 r270
  text "SwakeUpp Logic Rev1" at 151.85,101.8 h1 r270
Mechanical 1:
  lines w0: 103.972,97.347 ccw(c106.472,97.347) 106.472,94.847
  lines w0.2: 142.025,94.85 142.025,96.825 142,96.85 137.15,96.85 137.1,96.8 137.1,94.847 106.472,94.847 cw(c106.472,97.347) 103.972,97.347 103.972,132.347 cw(c106.472,132.347) 106.472,134.847 144.897,134.847 151.472,134.847 cw(c151.472,132.347) 153.972,132.347 153.972,97.347 cw(c151.471,97.347) 151.471,94.847 142.028,94.847

## Text inside footprints (layer, text, board x,y; h text height)
IC*: Mechanical 13 "CUTOUT POLYGON" at 152.41,116.201 h0.25 r270; Mechanical 13 "ANTENNA AREA" at 152.918,116.201 h0.25 r270